# Altium PCB main.PcbDoc (part 4 of 16)
Units mil, origin at the board's own origin, x right, y up, seen from the top; angles counter-clockwise.
Board outline 8394.75 x 5164.44 mil, 7 copper layers (Top Layer 1, Layer 2, Layer 3, Unused, Layer 4_pow, Layer 5_gnd, Bottom 6+gnd), stack 64.043 mil thick; 364 components, 409 nets, 1932 pads, 1061 vias.
Unrouted connection lines stored in the file: 2.
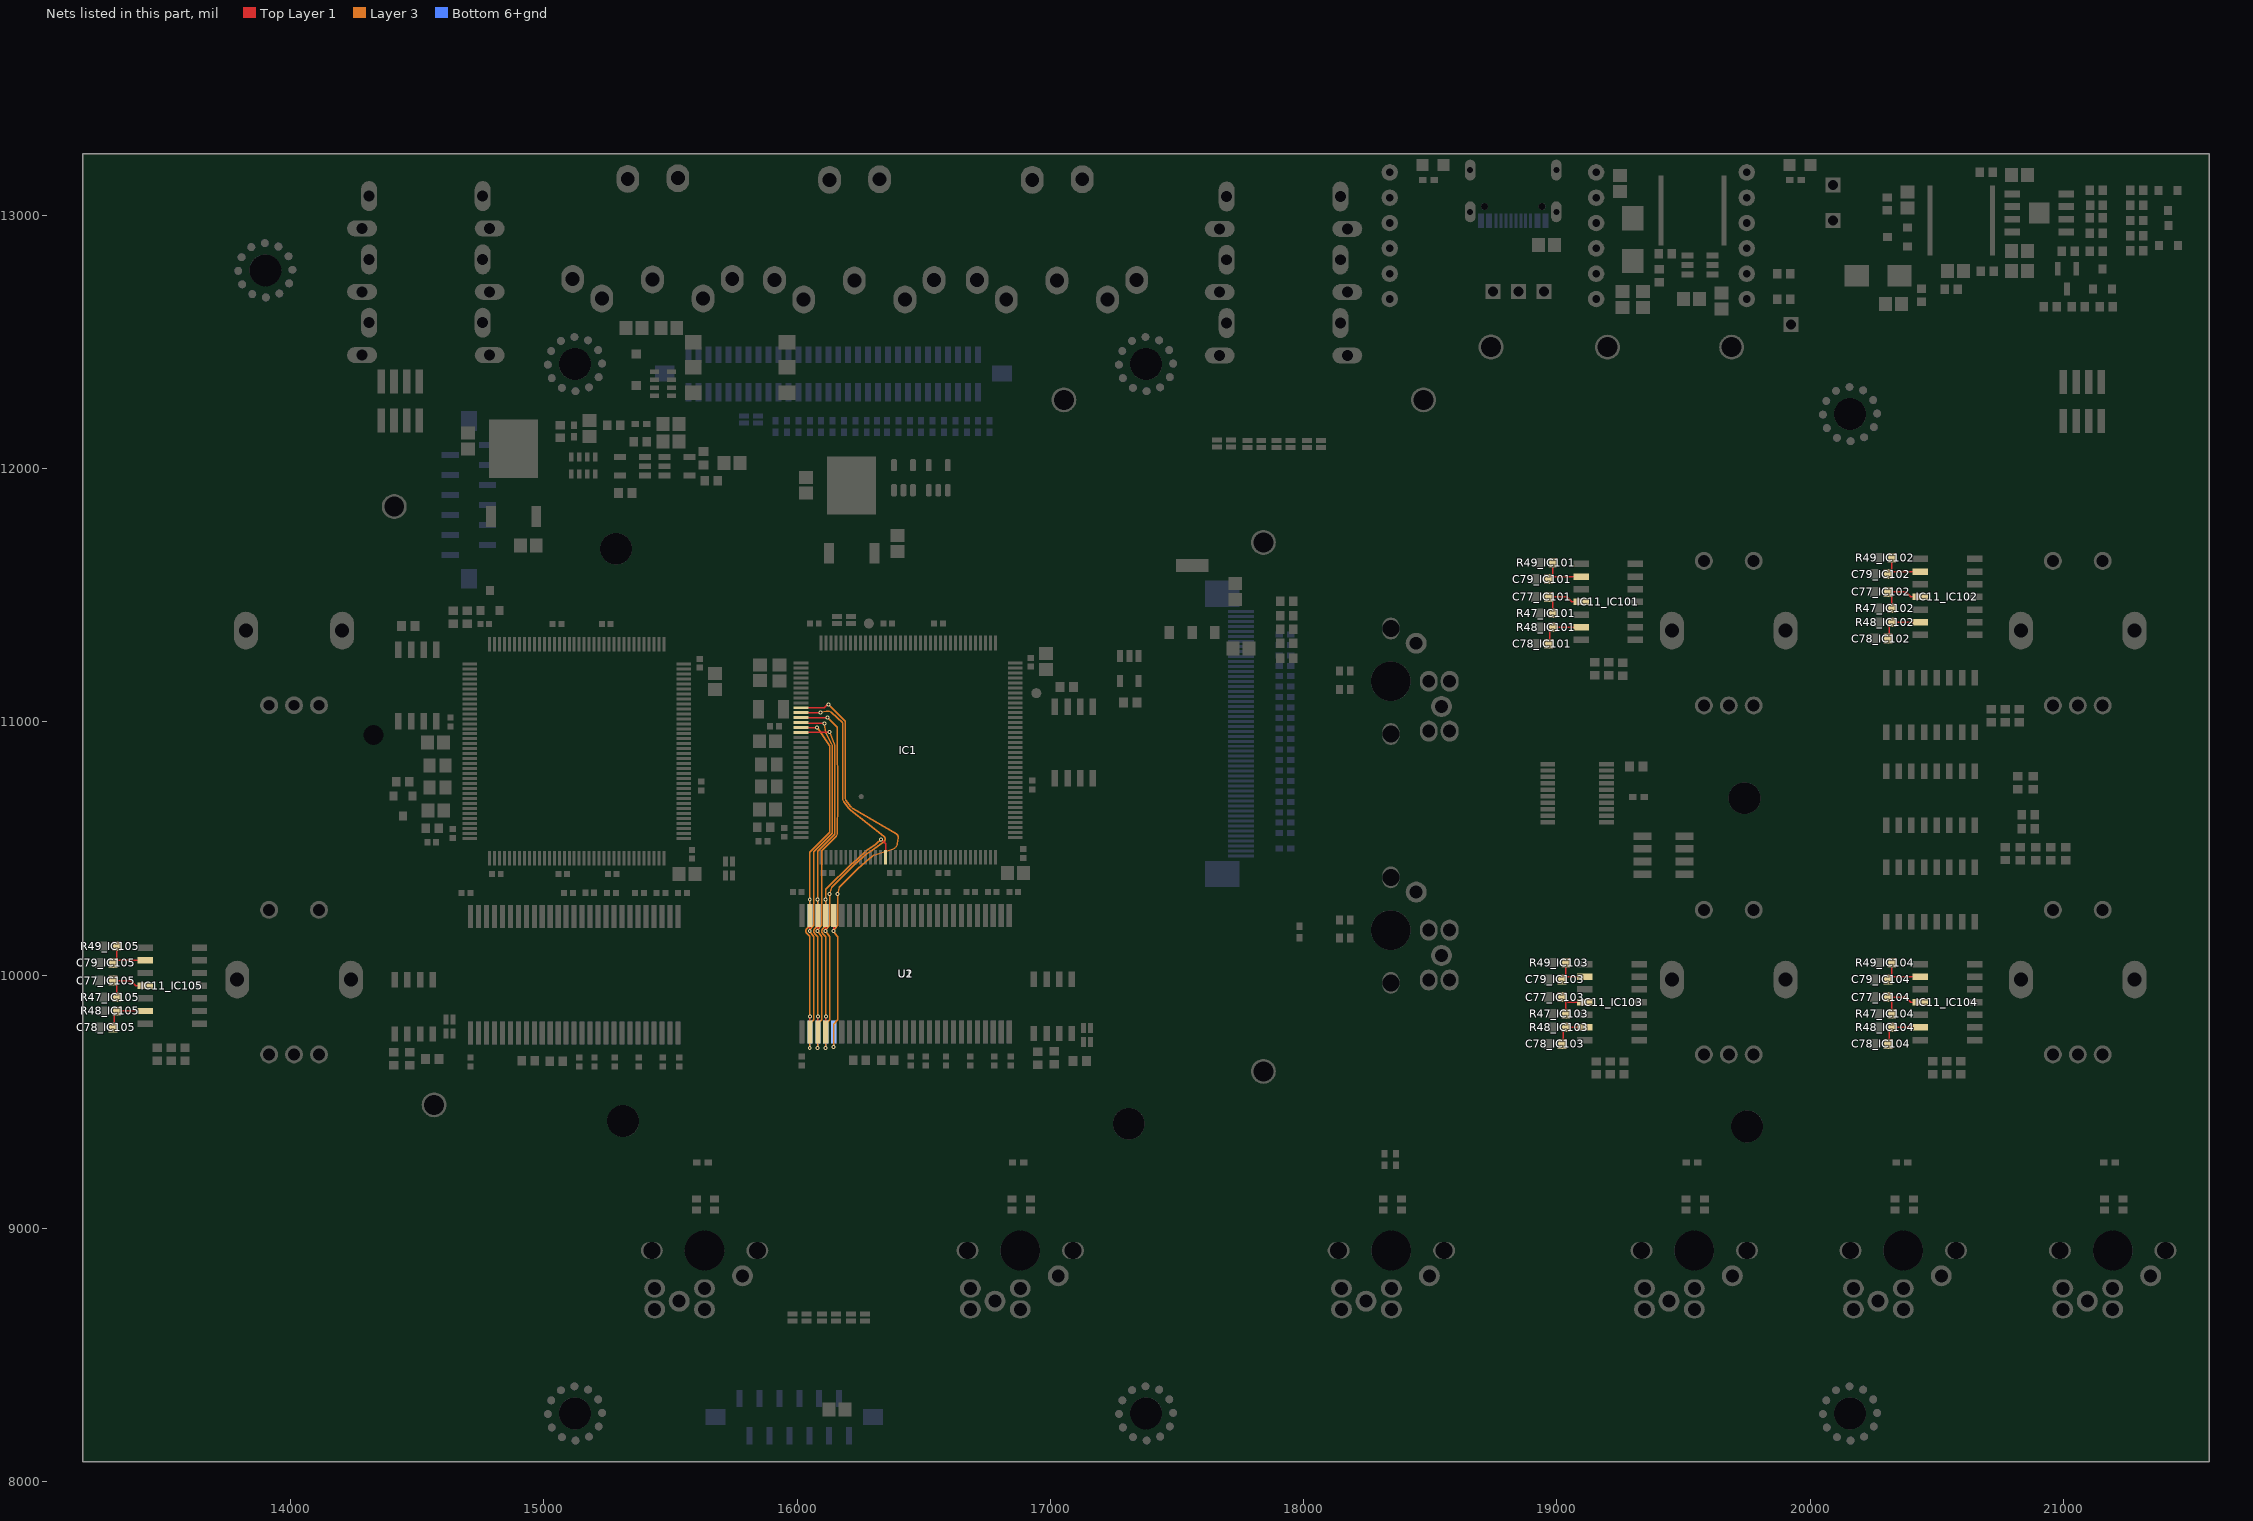
[diagram p7: the nets of this part, all layers, seen from the top]

## Via types
v1: diameter 15.75, hole 7.87, Top Layer 1 to Bottom 6+gnd, tented both sides, 961 vias
v2: diameter 27.56, hole 11.81, Top Layer 1 to Bottom 6+gnd, 45 vias
v3: diameter 23.62/23.62/23.62/23.62/23.62/23.62/23.62 (per signal layer), hole 12, Top Layer 1 to Bottom 6+gnd, tented top, 42 vias
v4: diameter 15.75, hole 7.87, Top Layer 1 to Bottom 6+gnd, 10 vias
v5: diameter 23.62/23.62/23.62/23.62/23.62/23.62/23.62 (per signal layer), hole 12, Top Layer 1 to Bottom 6+gnd, tented bottom, 3 vias

## Nets (pads, with @x,y where several pads share a name; then routed paths per layer and width w, separated by ;. In a path a pad name is that pad's centre, name@x,y a point inside that pad or via, vN(x,y) a via of type N, cw(c..) or ccw(c..) an arc to the next point about the centre after c; other vN are vias at no path point) (continued)
A0: IC1.10 U1.23 U2.23 | length 3439.8
  Top Layer 1 w5: IC1.10@16015.39,11056.14 16015.93,11056.67 16107.36,11056.67 16120.55,11069.86 v1(16123.41,11069.86) ; v1@16144.44,10174.62 U1.23@16144.44,10235.97
  Layer 3 w5: v1(16123.41,11069.86) 16188.13,11005.09 ; v1(16144.32,9716.01) 16144.32,9804.99 cw(c16149.32,9804.99) 16145.76,9808.51 16159.1,9821.89 ; v1(16144.44,10174.13) ccw(c16149.44,10174.13) 16145.49,10171.06 16159.51,10152.99 ; v1(16144.44,10174.13) cw(c16149.44,10174.13) v1@16145.51,10177.23 ; v1@16145.51,10177.22 16159.49,10194.98 ; v1(16160.27,10320.11) 16160.56,10302.31 ; v1@16160.27,10320.15 cw(c16165.27,10320.15) 16160.43,10321.39 16166.39,10345.1 cw(c16180.94,10341.44) 16170.29,10352.01 16236.64,10418.35 ; 16160.56,10149.97 16160.56,9825.33 ; 16189.59,11001.6 16189.62,10700.83 ccw(c16204.99,10700.79) 16192.68,10691.59 16212.01,10665.89 ; 16398.84,10542.97 16395.36,10518.61 ; 16159.1,9821.89 ccw(c16155.56,9825.42) 16160.56,9825.33 ; 16159.1,9821.89 ccw(c16155.56,9825.42) 16160.56,9825.33 ; 16159.1,9821.89 ccw(c16155.56,9825.42) 16160.56,9825.33 ; 16159.1,9821.89 ccw(c16155.56,9825.42) 16160.56,9825.33 ; 16159.1,9821.89 ccw(c16155.56,9825.42) 16160.56,9825.33 ; 16159.1,9821.89 ccw(c16155.56,9825.42) 16160.56,9825.33 ; 16159.1,9821.89 ccw(c16155.56,9825.42) 16160.56,9825.33 ; 16159.1,9821.89 ccw(c16155.56,9825.42) 16160.56,9825.33 ; 16159.1,9821.89 ccw(c16155.56,9825.42) 16160.56,9825.33 ; 16159.1,9821.89 ccw(c16155.56,9825.42) 16160.56,9825.33 ; 16159.1,9821.89 ccw(c16155.56,9825.42) 16160.56,9825.33 ; 16159.1,9821.89 ccw(c16155.56,9825.42) 16160.56,9825.33 ; 16159.1,9821.89 ccw(c16155.56,9825.42) 16160.56,9825.33 ; 16159.1,9821.89 ccw(c16155.56,9825.42) 16160.56,9825.33 ; 16159.1,9821.89 ccw(c16155.56,9825.42) 16160.56,9825.33 ; 16159.1,9821.89 ccw(c16155.56,9825.42) 16160.56,9825.33 ; 16159.51,10152.99 cw(c16155.56,10149.93) 16160.56,10150.02 ; 16159.51,10152.99 cw(c16155.56,10149.93) 16160.56,10150.02 ; 16159.51,10152.99 cw(c16155.56,10149.93) 16160.56,10150.02 ; 16159.51,10152.99 cw(c16155.56,10149.93) 16160.56,10150.02 ; 16159.51,10152.99 cw(c16155.56,10149.93) 16160.56,10150.02 ; 16159.51,10152.99 cw(c16155.56,10149.93) 16160.56,10150.02 ; 16159.51,10152.99 cw(c16155.56,10149.93) 16160.56,10150.02 ; 16159.51,10152.99 cw(c16155.56,10149.93) 16160.56,10150.02 ; 16159.51,10152.99 cw(c16155.56,10149.93) 16160.56,10150.02 ; 16159.51,10152.99 cw(c16155.56,10149.93) 16160.56,10150.02 ; 16159.51,10152.99 cw(c16155.56,10149.93) 16160.56,10150.02 ; 16159.51,10152.99 cw(c16155.56,10149.93) 16160.56,10150.02 ; 16159.51,10152.99 cw(c16155.56,10149.93) 16160.56,10150.02 ; 16159.51,10152.99 cw(c16155.56,10149.93) 16160.56,10150.02 ; 16159.51,10152.99 cw(c16155.56,10149.93) 16160.56,10150.02 ; 16159.51,10152.99 cw(c16155.56,10149.93) 16160.56,10150.02 ; 16159.49,10194.98 ccw(c16155.56,10198.07) 16160.56,10197.98 ; 16159.49,10194.98 ccw(c16155.56,10198.07) 16160.56,10197.98 ; 16159.49,10194.98 ccw(c16155.56,10198.07) 16160.56,10197.98 ; 16159.49,10194.98 ccw(c16155.56,10198.07) 16160.56,10197.98 ; 16159.49,10194.98 ccw(c16155.56,10198.07) 16160.56,10197.98 ; 16159.49,10194.98 ccw(c16155.56,10198.07) 16160.56,10197.98 ; 16159.49,10194.98 ccw(c16155.56,10198.07) 16160.56,10197.98 ; 16159.49,10194.98 ccw(c16155.56,10198.07) 16160.56,10197.98 ; 16159.49,10194.98 ccw(c16155.56,10198.07) 16160.56,10197.98 ; 16159.49,10194.98 ccw(c16155.56,10198.07) 16160.56,10197.98 ; 16159.49,10194.98 ccw(c16155.56,10198.07) 16160.56,10197.98 ; 16159.49,10194.98 ccw(c16155.56,10198.07) 16160.56,10197.98 ; 16159.49,10194.98 ccw(c16155.56,10198.07) 16160.56,10197.98 ; 16159.49,10194.98 ccw(c16155.56,10198.07) 16160.56,10197.98 ; 16159.49,10194.98 ccw(c16155.56,10198.07) 16160.56,10197.98 ; 16159.49,10194.98 ccw(c16155.56,10198.07) 16160.56,10197.98 ; 16160.56,10197.98 16160.56,10302.24 ; 16160.56,10302.25 ccw(c16155.56,10302.23) 16160.56,10302.31 ; 16160.56,10302.25 ccw(c16155.56,10302.23) 16160.56,10302.31 ; 16160.56,10302.25 ccw(c16155.56,10302.23) 16160.56,10302.31 ; 16160.56,10302.25 ccw(c16155.56,10302.23) 16160.56,10302.31 ; 16160.56,10302.25 ccw(c16155.56,10302.23) 16160.56,10302.31 ; 16188.13,11005.09 cw(c16184.59,11001.56) 16189.59,11001.65 ; 16188.13,11005.09 cw(c16184.59,11001.56) 16189.59,11001.65 ; 16188.13,11005.09 cw(c16184.59,11001.56) 16189.59,11001.65 ; 16188.13,11005.09 cw(c16184.59,11001.56) 16189.59,11001.65 ; 16188.13,11005.09 cw(c16184.59,11001.56) 16189.59,11001.65 ; 16188.13,11005.09 cw(c16184.59,11001.56) 16189.59,11001.65 ; 16188.13,11005.09 cw(c16184.59,11001.56) 16189.59,11001.65 ; 16188.13,11005.09 cw(c16184.59,11001.56) 16189.59,11001.65 ; 16188.13,11005.09 cw(c16184.59,11001.56) 16189.59,11001.65 ; 16188.13,11005.09 cw(c16184.59,11001.56) 16189.59,11001.65 ; 16188.13,11005.09 cw(c16184.59,11001.56) 16189.59,11001.65 ; 16188.13,11005.09 cw(c16184.59,11001.56) 16189.59,11001.65 ; 16188.13,11005.09 cw(c16184.59,11001.56) 16189.59,11001.65 ; 16188.13,11005.09 cw(c16184.59,11001.56) 16189.59,11001.65 ; 16188.13,11005.09 cw(c16184.59,11001.56) 16189.59,11001.65 ; 16188.13,11005.09 cw(c16184.59,11001.56) 16189.59,11001.65 ; 16212.01,10665.89 ccw(c16240.24,10687.2) 16222.46,10656.62 ; 16212.01,10665.89 ccw(c16240.24,10687.2) 16222.46,10656.62 ; 16212.01,10665.89 ccw(c16240.24,10687.2) 16222.46,10656.62 ; 16212.01,10665.89 ccw(c16240.24,10687.2) 16222.46,10656.62 ; 16212.01,10665.89 ccw(c16240.24,10687.2) 16222.46,10656.62 ; 16212.01,10665.89 ccw(c16240.24,10687.2) 16222.46,10656.62 ; 16212.01,10665.89 ccw(c16240.24,10687.2) 16222.46,10656.62 ; 16212.01,10665.89 ccw(c16240.24,10687.2) 16222.46,10656.62 ; 16212.01,10665.89 ccw(c16240.24,10687.2) 16222.46,10656.62 ; 16212.01,10665.89 ccw(c16240.24,10687.2) 16222.46,10656.62 ; 16212.01,10665.89 ccw(c16240.24,10687.2) 16222.46,10656.62 ; 16212.01,10665.89 ccw(c16240.24,10687.2) 16222.46,10656.62 ; 16212.01,10665.89 ccw(c16240.24,10687.2) 16222.46,10656.62 ; 16212.01,10665.89 ccw(c16240.24,10687.2) 16222.46,10656.62 ; 16212.01,10665.89 ccw(c16240.24,10687.2) 16222.46,10656.62 ; 16212.01,10665.89 ccw(c16240.24,10687.2) 16222.46,10656.62 ; 16222.46,10656.62 16391.35,10558.44 ; 16236.64,10418.35 cw(c16275.42,10379.36) 16239.05,10420.61 ; 16236.64,10418.35 cw(c16275.42,10379.36) 16239.05,10420.61 ; 16236.64,10418.35 cw(c16275.42,10379.36) 16239.05,10420.61 ; 16236.64,10418.35 cw(c16275.42,10379.36) 16239.05,10420.61 ; 16236.64,10418.35 cw(c16275.42,10379.36) 16239.05,10420.61 ; 16236.64,10418.35 cw(c16275.42,10379.36) 16239.05,10420.61 ; 16236.64,10418.35 cw(c16275.42,10379.36) 16239.05,10420.61 ; 16236.64,10418.35 cw(c16275.42,10379.36) 16239.05,10420.61 ; 16236.64,10418.35 cw(c16275.42,10379.36) 16239.05,10420.61 ; 16236.64,10418.35 cw(c16275.42,10379.36) 16239.05,10420.61 ; 16236.64,10418.35 cw(c16275.42,10379.36) 16239.05,10420.61 ; 16236.64,10418.35 cw(c16275.42,10379.36) 16239.05,10420.61 ; 16236.64,10418.35 cw(c16275.42,10379.36) 16239.05,10420.61 ; 16236.64,10418.35 cw(c16275.42,10379.36) 16239.05,10420.61 ; 16236.64,10418.35 cw(c16275.42,10379.36) 16239.05,10420.61 ; 16236.64,10418.35 cw(c16275.42,10379.36) 16239.05,10420.61 ; 16239.05,10420.61 16286.71,10462.64 ; 16286.71,10462.64 cw(c16329.94,10413.6) 16309.72,10475.77 ; 16286.71,10462.64 cw(c16329.94,10413.6) 16309.72,10475.77 ; 16286.71,10462.64 cw(c16329.94,10413.6) 16309.72,10475.77 ; 16286.71,10462.64 cw(c16329.94,10413.6) 16309.72,10475.77 ; 16286.71,10462.64 cw(c16329.94,10413.6) 16309.72,10475.77 ; 16286.71,10462.64 cw(c16329.94,10413.6) 16309.72,10475.77 ; 16286.71,10462.64 cw(c16329.94,10413.6) 16309.72,10475.77 ; 16286.71,10462.64 cw(c16329.94,10413.6) 16309.72,10475.77 ; 16286.71,10462.64 cw(c16329.94,10413.6) 16309.72,10475.77 ; 16286.71,10462.64 cw(c16329.94,10413.6) 16309.72,10475.77 ; 16286.71,10462.64 cw(c16329.94,10413.6) 16309.72,10475.77 ; 16286.71,10462.64 cw(c16329.94,10413.6) 16309.72,10475.77 ; 16286.71,10462.64 cw(c16329.94,10413.6) 16309.72,10475.77 ; 16286.71,10462.64 cw(c16329.94,10413.6) 16309.72,10475.77 ; 16286.71,10462.64 cw(c16329.94,10413.6) 16309.72,10475.77 ; 16286.71,10462.64 cw(c16329.94,10413.6) 16309.72,10475.77 ; 16309.72,10475.77 16378.11,10498.08 ; 16378.11,10498.08 ccw(c16370.24,10522.2) 16395.35,10518.61 ; 16378.11,10498.08 ccw(c16370.24,10522.2) 16395.35,10518.61 ; 16378.11,10498.08 ccw(c16370.24,10522.2) 16395.35,10518.61 ; 16378.11,10498.08 ccw(c16370.24,10522.2) 16395.35,10518.61 ; 16378.11,10498.08 ccw(c16370.24,10522.2) 16395.35,10518.61 ; 16378.11,10498.08 ccw(c16370.24,10522.2) 16395.35,10518.61 ; 16378.11,10498.08 ccw(c16370.24,10522.2) 16395.35,10518.61 ; 16378.11,10498.08 ccw(c16370.24,10522.2) 16395.35,10518.61 ; 16378.11,10498.08 ccw(c16370.24,10522.2) 16395.35,10518.61 ; 16378.11,10498.08 ccw(c16370.24,10522.2) 16395.35,10518.61 ; 16378.11,10498.08 ccw(c16370.24,10522.2) 16395.35,10518.61 ; 16378.11,10498.08 ccw(c16370.24,10522.2) 16395.35,10518.61 ; 16378.11,10498.08 ccw(c16370.24,10522.2) 16395.35,10518.61 ; 16378.11,10498.08 ccw(c16370.24,10522.2) 16395.35,10518.61 ; 16378.11,10498.08 ccw(c16370.24,10522.2) 16395.35,10518.61 ; 16378.11,10498.08 ccw(c16370.24,10522.2) 16395.35,10518.61 ; 16391.34,10558.44 cw(c16383.62,10545.15) 16398.84,10542.98 ; 16391.35,10558.44 cw(c16383.62,10545.15) 16398.84,10542.98 ; 16391.35,10558.44 cw(c16383.62,10545.15) 16398.84,10542.98 ; 16391.35,10558.44 cw(c16383.62,10545.15) 16398.84,10542.98 ; 16391.35,10558.44 cw(c16383.62,10545.15) 16398.84,10542.98 ; 16391.35,10558.44 cw(c16383.62,10545.15) 16398.84,10542.98 ; 16391.35,10558.44 cw(c16383.62,10545.15) 16398.84,10542.98 ; 16391.35,10558.44 cw(c16383.62,10545.15) 16398.84,10542.98 ; 16391.35,10558.44 cw(c16383.62,10545.15) 16398.84,10542.98 ; 16391.35,10558.44 cw(c16383.62,10545.15) 16398.84,10542.98 ; 16391.35,10558.44 cw(c16383.62,10545.15) 16398.84,10542.98 ; 16391.35,10558.44 cw(c16383.62,10545.15) 16398.84,10542.98 ; 16391.35,10558.44 cw(c16383.62,10545.15) 16398.84,10542.98 ; 16391.35,10558.44 cw(c16383.62,10545.15) 16398.84,10542.98 ; 16391.35,10558.44 cw(c16383.62,10545.15) 16398.84,10542.98 ; 16391.35,10558.44 cw(c16383.62,10545.15) 16398.84,10542.98
  Bottom 6+gnd w5: v1@16144.69,9713.75 U2.23@16144.69,9775.59
A1: IC1.11 U1.24 U2.24 | length 2953.5
  Top Layer 1 w5: IC1.11@16015.55,11036.61 16016.21,11037.27 16092.53,11037.27 v1(16093.35,11038.08) ; v1(16112.94,10174.13) U1.24@16112.94,10235.97
  Layer 3 w5: v1(16093.35,11038.08) 16115.67,11042.16 ; v1(16112.94,9713.5) 16112.94,9805.11 cw(c16117.94,9805.12) 16114.39,9808.63 16127.61,9821.89 ; v1@16112.96,10174.12 ccw(c16117.1,10176.92) 16113.03,10174.01 16128.14,10152.83 ; v1@16112.94,10179.83 16112.94,10179.7 cw(c16117.1,10176.92) 16113.53,10180.41 16127.61,10194.54 ; v1(16128.78,10320.11) 16129.07,10302.31 ; 16129.07,9825.38 16129.07,10149.97 ; 16138.82,10348.82 ccw(c16149.44,10338.23) 16135.04,10342.41 v1@16128.98,10321.55 ; 16138.83,10348.83 16222.49,10432.49 ; 16179.59,10994.71 16179.62,10700.78 ; 16115.67,11042.16 cw(c16120.24,11017.2) 16137.47,11035.83 ; 16115.67,11042.16 cw(c16120.24,11017.2) 16137.47,11035.83 ; 16115.67,11042.16 cw(c16120.24,11017.2) 16137.47,11035.83 ; 16115.67,11042.16 cw(c16120.24,11017.2) 16137.47,11035.83 ; 16115.67,11042.16 cw(c16120.24,11017.2) 16137.47,11035.83 ; 16127.61,9821.89 ccw(c16124.07,9825.42) 16129.07,9825.33 ; 16127.61,9821.89 ccw(c16124.07,9825.42) 16129.07,9825.33 ; 16127.61,9821.89 ccw(c16124.07,9825.42) 16129.07,9825.33 ; 16127.61,9821.89 ccw(c16124.07,9825.42) 16129.07,9825.33 ; 16127.61,9821.89 ccw(c16124.07,9825.42) 16129.07,9825.33 ; 16127.61,9821.89 ccw(c16124.07,9825.42) 16129.07,9825.33 ; 16127.61,9821.89 ccw(c16124.07,9825.42) 16129.07,9825.33 ; 16127.61,9821.89 ccw(c16124.07,9825.42) 16129.07,9825.33 ; 16127.61,9821.89 ccw(c16124.07,9825.42) 16129.07,9825.33 ; 16127.61,9821.89 ccw(c16124.07,9825.42) 16129.07,9825.33 ; 16127.61,9821.89 ccw(c16124.07,9825.42) 16129.07,9825.33 ; 16127.61,9821.89 ccw(c16124.07,9825.42) 16129.07,9825.33 ; 16127.61,9821.89 ccw(c16124.07,9825.42) 16129.07,9825.33 ; 16127.61,9821.89 ccw(c16124.07,9825.42) 16129.07,9825.33 ; 16127.61,9821.89 ccw(c16124.07,9825.42) 16129.07,9825.33 ; 16127.61,9821.89 ccw(c16124.07,9825.42) 16129.07,9825.33 ; 16127.61,10194.54 ccw(c16124.07,10198.07) 16129.07,10197.98 ; 16127.61,10194.54 ccw(c16124.07,10198.07) 16129.07,10197.98 ; 16127.61,10194.54 ccw(c16124.07,10198.07) 16129.07,10197.98 ; 16127.61,10194.54 ccw(c16124.07,10198.07) 16129.07,10197.98 ; 16127.61,10194.54 ccw(c16124.07,10198.07) 16129.07,10197.98 ; 16127.61,10194.54 ccw(c16124.07,10198.07) 16129.07,10197.98 ; 16127.61,10194.54 ccw(c16124.07,10198.07) 16129.07,10197.98 ; 16127.61,10194.54 ccw(c16124.07,10198.07) 16129.07,10197.98 ; 16127.61,10194.54 ccw(c16124.07,10198.07) 16129.07,10197.98 ; 16127.61,10194.54 ccw(c16124.07,10198.07) 16129.07,10197.98 ; 16127.61,10194.54 ccw(c16124.07,10198.07) 16129.07,10197.98 ; 16127.61,10194.54 ccw(c16124.07,10198.07) 16129.07,10197.98 ; 16127.61,10194.54 ccw(c16124.07,10198.07) 16129.07,10197.98 ; 16127.61,10194.54 ccw(c16124.07,10198.07) 16129.07,10197.98 ; 16127.61,10194.54 ccw(c16124.07,10198.07) 16129.07,10197.98 ; 16127.61,10194.54 ccw(c16124.07,10198.07) 16129.07,10197.98 ; 16128.14,10152.83 cw(c16124.07,10149.93) 16129.07,10150.02 ; 16128.14,10152.83 cw(c16124.07,10149.93) 16129.07,10150.02 ; 16128.14,10152.83 cw(c16124.07,10149.93) 16129.07,10150.02 ; 16128.14,10152.83 cw(c16124.07,10149.93) 16129.07,10150.02 ; 16128.14,10152.83 cw(c16124.07,10149.93) 16129.07,10150.02 ; 16128.14,10152.83 cw(c16124.07,10149.93) 16129.07,10150.02 ; 16128.14,10152.83 cw(c16124.07,10149.93) 16129.07,10150.02 ; 16128.14,10152.83 cw(c16124.07,10149.93) 16129.07,10150.02 ; 16128.14,10152.83 cw(c16124.07,10149.93) 16129.07,10150.02 ; 16128.14,10152.83 cw(c16124.07,10149.93) 16129.07,10150.02 ; 16128.14,10152.83 cw(c16124.07,10149.93) 16129.07,10150.02 ; 16128.14,10152.83 cw(c16124.07,10149.93) 16129.07,10150.02 ; 16128.14,10152.83 cw(c16124.07,10149.93) 16129.07,10150.02 ; 16128.14,10152.83 cw(c16124.07,10149.93) 16129.07,10150.02 ; 16128.14,10152.83 cw(c16124.07,10149.93) 16129.07,10150.02 ; 16128.14,10152.83 cw(c16124.07,10149.93) 16129.07,10150.02 ; v1@16128.78,10320.15 cw(c16133.78,10320.15) v1@16128.98,10321.55 ; v1@16128.78,10320.15 cw(c16133.78,10320.15) v1@16128.98,10321.55 ; v1@16128.78,10320.15 cw(c16133.78,10320.15) v1@16128.98,10321.55 ; v1@16128.78,10320.15 cw(c16133.78,10320.15) v1@16128.98,10321.55 ; v1@16128.78,10320.15 cw(c16133.78,10320.15) v1@16128.98,10321.55 ; v1@16128.78,10320.15 cw(c16133.78,10320.15) v1@16128.98,10321.55 ; v1@16128.78,10320.15 cw(c16133.78,10320.15) v1@16128.98,10321.55 ; v1@16128.78,10320.15 cw(c16133.78,10320.15) v1@16128.98,10321.55 ; v1@16128.78,10320.15 cw(c16133.78,10320.15) 16128.97,10321.54 ccw(c16133.78,10320.15) v1@16128.78,10320.15 ; 16129.07,10197.98 16129.07,10302.24 ; 16129.07,10302.25 ccw(c16124.07,10302.23) 16129.07,10302.31 ; 16129.07,10302.25 ccw(c16124.07,10302.23) 16129.07,10302.31 ; 16129.07,10302.25 ccw(c16124.07,10302.23) 16129.07,10302.31 ; 16129.07,10302.25 ccw(c16124.07,10302.23) 16129.07,10302.31 ; 16129.07,10302.25 ccw(c16124.07,10302.23) 16129.07,10302.31 ; 16137.47,11035.83 16177.99,10998.34 ; 16177.99,10998.34 cw(c16174.59,10994.67) 16179.59,10994.76 ; 16177.99,10998.34 cw(c16174.59,10994.67) 16179.59,10994.76 ; 16177.99,10998.34 cw(c16174.59,10994.67) 16179.59,10994.76 ; 16177.99,10998.34 cw(c16174.59,10994.67) 16179.59,10994.76 ; 16177.99,10998.34 cw(c16174.59,10994.67) 16179.59,10994.76 ; 16177.99,10998.34 cw(c16174.59,10994.67) 16179.59,10994.76 ; 16177.99,10998.34 cw(c16174.59,10994.67) 16179.59,10994.76 ; 16177.99,10998.34 cw(c16174.59,10994.67) 16179.59,10994.76 ; 16177.99,10998.34 cw(c16174.59,10994.67) 16179.59,10994.76 ; 16177.99,10998.34 cw(c16174.59,10994.67) 16179.59,10994.76 ; 16177.99,10998.34 cw(c16174.59,10994.67) 16179.59,10994.76 ; 16177.99,10998.34 cw(c16174.59,10994.67) 16179.59,10994.76 ; 16177.99,10998.34 cw(c16174.59,10994.67) 16179.59,10994.76 ; 16177.99,10998.34 cw(c16174.59,10994.67) 16179.59,10994.76 ; 16177.99,10998.34 cw(c16174.59,10994.67) 16179.59,10994.76 ; 16177.99,10998.34 cw(c16174.59,10994.67) 16179.59,10994.76 ; 16179.62,10700.78 ccw(c16204.99,10700.79) 16184.7,10685.56 ; 16179.62,10700.78 ccw(c16204.99,10700.79) 16184.7,10685.56 ; 16179.62,10700.78 ccw(c16204.99,10700.79) 16184.7,10685.56 ; 16179.62,10700.78 ccw(c16204.99,10700.79) 16184.7,10685.56 ; 16179.62,10700.78 ccw(c16204.99,10700.79) 16184.7,10685.56 ; 16179.62,10700.78 ccw(c16204.99,10700.79) 16184.7,10685.56 ; 16179.62,10700.78 ccw(c16204.99,10700.79) 16184.7,10685.56 ; 16179.62,10700.78 ccw(c16204.99,10700.79) 16184.7,10685.56 ; 16179.62,10700.78 ccw(c16204.99,10700.79) 16184.7,10685.56 ; 16179.62,10700.78 ccw(c16204.99,10700.79) 16184.7,10685.56 ; 16179.62,10700.78 ccw(c16204.99,10700.79) 16184.7,10685.56 ; 16179.62,10700.78 ccw(c16204.99,10700.79) 16184.7,10685.56 ; 16179.62,10700.78 ccw(c16204.99,10700.79) 16184.7,10685.56 ; 16179.62,10700.78 ccw(c16204.99,10700.79) 16184.7,10685.56 ; 16179.62,10700.78 ccw(c16204.99,10700.79) 16184.7,10685.56 ; 16179.62,10700.78 ccw(c16204.99,10700.79) 16184.7,10685.56 ; 16184.7,10685.56 16203.99,10659.9 ; 16203.99,10659.9 ccw(c16240.24,10687.2) 16212.05,10651.64 ; 16203.99,10659.9 ccw(c16240.24,10687.2) 16212.05,10651.64 ; 16203.99,10659.9 ccw(c16240.24,10687.2) 16212.05,10651.64 ; 16203.99,10659.9 ccw(c16240.24,10687.2) 16212.05,10651.64 ; 16203.99,10659.9 ccw(c16240.24,10687.2) 16212.05,10651.64 ; 16203.99,10659.9 ccw(c16240.24,10687.2) 16212.05,10651.64 ; 16203.99,10659.9 ccw(c16240.24,10687.2) 16212.05,10651.64 ; 16203.99,10659.9 ccw(c16240.24,10687.2) 16212.05,10651.64 ; 16203.99,10659.9 ccw(c16240.24,10687.2) 16212.05,10651.64 ; 16203.99,10659.9 ccw(c16240.24,10687.2) 16212.05,10651.64 ; 16203.99,10659.9 ccw(c16240.24,10687.2) 16212.05,10651.64 ; 16203.99,10659.9 ccw(c16240.24,10687.2) 16212.05,10651.64 ; 16203.99,10659.9 ccw(c16240.24,10687.2) 16212.05,10651.64 ; 16203.99,10659.9 ccw(c16240.24,10687.2) 16212.05,10651.64 ; 16203.99,10659.9 ccw(c16240.24,10687.2) 16212.05,10651.64 ; 16203.99,10659.9 ccw(c16240.24,10687.2) 16212.05,10651.64 ; 16212.05,10651.64 16341.72,10548.88 ; 16222.49,10432.49 cw(c16275.42,10379.36) 16225.87,10435.65 ; 16222.49,10432.49 cw(c16275.42,10379.36) 16225.87,10435.65 ; 16222.49,10432.49 cw(c16275.42,10379.36) 16225.87,10435.65 ; 16222.49,10432.49 cw(c16275.42,10379.36) 16225.87,10435.65 ; 16222.49,10432.49 cw(c16275.42,10379.36) 16225.87,10435.65 ; 16222.49,10432.49 cw(c16275.42,10379.36) 16225.87,10435.65 ; 16222.49,10432.49 cw(c16275.42,10379.36) 16225.87,10435.65 ; 16222.49,10432.49 cw(c16275.42,10379.36) 16225.87,10435.65 ; 16222.49,10432.49 cw(c16275.42,10379.36) 16225.87,10435.65 ; 16222.49,10432.49 cw(c16275.42,10379.36) 16225.87,10435.65 ; 16222.49,10432.49 cw(c16275.42,10379.36) 16225.87,10435.65 ; 16222.49,10432.49 cw(c16275.42,10379.36) 16225.87,10435.65 ; 16222.49,10432.49 cw(c16275.42,10379.36) 16225.87,10435.65 ; 16222.49,10432.49 cw(c16275.42,10379.36) 16225.87,10435.65 ; 16222.49,10432.49 cw(c16275.42,10379.36) 16225.87,10435.65 ; 16222.49,10432.49 cw(c16275.42,10379.36) 16225.87,10435.65 ; 16225.87,10435.65 16273.47,10477.63 ; 16273.47,10477.63 cw(c16329.94,10413.6) 16282.03,10484.26 ; 16273.47,10477.63 cw(c16329.94,10413.6) 16282.03,10484.26 ; 16273.47,10477.63 cw(c16329.94,10413.6) 16282.03,10484.26 ; 16273.47,10477.63 cw(c16329.94,10413.6) 16282.03,10484.26 ; 16273.47,10477.63 cw(c16329.94,10413.6) 16282.03,10484.26 ; 16273.47,10477.63 cw(c16329.94,10413.6) 16282.03,10484.26 ; 16273.47,10477.63 cw(c16329.94,10413.6) 16282.03,10484.26 ; 16273.47,10477.63 cw(c16329.94,10413.6) 16282.03,10484.26 ; 16273.47,10477.63 cw(c16329.94,10413.6) 16282.03,10484.26 ; 16273.47,10477.63 cw(c16329.94,10413.6) 16282.03,10484.26 ; 16273.47,10477.63 cw(c16329.94,10413.6) 16282.03,10484.26 ; 16273.47,10477.63 cw(c16329.94,10413.6) 16282.03,10484.26 ; 16273.47,10477.63 cw(c16329.94,10413.6) 16282.03,10484.26 ; 16273.47,10477.63 cw(c16329.94,10413.6) 16282.03,10484.26 ; 16273.47,10477.63 cw(c16329.94,10413.6) 16282.03,10484.26 ; 16273.47,10477.63 cw(c16329.94,10413.6) 16282.03,10484.26 ; 16282.03,10484.26 16340.8,10524.1 ; 16340.8,10524.11 ccw(c16332.17,10536.83) 16341.72,10548.88 ; 16340.8,10524.11 ccw(c16332.17,10536.83) 16341.72,10548.88 ; 16340.8,10524.11 ccw(c16332.17,10536.83) 16341.72,10548.88 ; 16340.8,10524.11 ccw(c16332.17,10536.83) 16341.72,10548.88 ; 16340.8,10524.11 ccw(c16332.17,10536.83) 16341.72,10548.88 ; 16340.8,10524.11 ccw(c16332.17,10536.83) 16341.72,10548.88 ; 16340.8,10524.11 ccw(c16332.17,10536.83) 16341.72,10548.88 ; 16340.8,10524.1 ccw(c16332.17,10536.83) 16341.72,10548.88
  Bottom 6+gnd w5: v1@16113.19,9713.75 U2.24@16113.19,9775.59
A2: IC1.12 U1.25 U2.25 | length 1805.6
  Top Layer 1 w5: IC1.12@16015.39,11016.77 16015.61,11016.99 16120.02,11016.99 v1(16120.24,11017.2) ; v1(16081.45,10174.13) U1.25@16081.45,10235.98
  Layer 3 w5: v1(16081.45,9713.5) 16081.45,9805.11 cw(c16086.45,9805.12) 16082.89,9808.63 16096.11,9821.89 ; v1@16081.46,10174.12 ccw(c16085.6,10176.92) 16081.53,10174.01 16096.64,10152.83 ; v1@16081.45,10179.83 16081.45,10179.7 cw(c16085.6,10176.92) 16082.03,10180.41 16096.11,10194.54 ; 16097.57,9825.38 16097.57,10150.02 ; v1(16120.24,11017.2) 16158.03,10979.41 ; 16158.11,10979.32 cw(c16154.49,10975.88) 16159.49,10975.88 16159.54,10682.14 cw(c16149.53,10682.09) 16159.53,10682.07 16159.51,10564.01 cw(c16134.51,10564.02) 16152.24,10546.4 16099.02,10493.17 ; 16096.11,9821.89 ccw(c16092.57,9825.42) 16097.57,9825.33 ; 16096.11,9821.89 ccw(c16092.57,9825.42) 16097.57,9825.33 ; 16096.11,9821.89 ccw(c16092.57,9825.42) 16097.57,9825.33 ; 16096.11,9821.89 ccw(c16092.57,9825.42) 16097.57,9825.33 ; 16096.11,9821.89 ccw(c16092.57,9825.42) 16097.57,9825.33 ; 16096.11,9821.89 ccw(c16092.57,9825.42) 16097.57,9825.33 ; 16096.11,9821.89 ccw(c16092.57,9825.42) 16097.57,9825.33 ; 16096.11,9821.89 ccw(c16092.57,9825.42) 16097.57,9825.33 ; 16096.11,9821.89 ccw(c16092.57,9825.42) 16097.57,9825.33 ; 16096.11,9821.89 ccw(c16092.57,9825.42) 16097.57,9825.33 ; 16096.11,9821.89 ccw(c16092.57,9825.42) 16097.57,9825.33 ; 16096.11,9821.89 ccw(c16092.57,9825.42) 16097.57,9825.33 ; 16096.11,9821.89 ccw(c16092.57,9825.42) 16097.57,9825.33 ; 16096.11,9821.89 ccw(c16092.57,9825.42) 16097.57,9825.33 ; 16096.11,9821.89 ccw(c16092.57,9825.42) 16097.57,9825.33 ; 16096.11,9821.89 ccw(c16092.57,9825.42) 16097.57,9825.33 ; 16096.11,10194.54 ccw(c16092.57,10198.07) 16097.57,10197.98 ; 16096.11,10194.54 ccw(c16092.57,10198.07) 16097.57,10197.98 ; 16096.11,10194.54 ccw(c16092.57,10198.07) 16097.57,10197.98 ; 16096.11,10194.54 ccw(c16092.57,10198.07) 16097.57,10197.98 ; 16096.11,10194.54 ccw(c16092.57,10198.07) 16097.57,10197.98 ; 16096.11,10194.54 ccw(c16092.57,10198.07) 16097.57,10197.98 ; 16096.11,10194.54 ccw(c16092.57,10198.07) 16097.57,10197.98 ; 16096.11,10194.54 ccw(c16092.57,10198.07) 16097.57,10197.98 ; 16096.11,10194.54 ccw(c16092.57,10198.07) 16097.57,10197.98 ; 16096.11,10194.54 ccw(c16092.57,10198.07) 16097.57,10197.98 ; 16096.11,10194.54 ccw(c16092.57,10198.07) 16097.57,10197.98 ; 16096.11,10194.54 ccw(c16092.57,10198.07) 16097.57,10197.98 ; 16096.11,10194.54 ccw(c16092.57,10198.07) 16097.57,10197.98 ; 16096.11,10194.54 ccw(c16092.57,10198.07) 16097.57,10197.98 ; 16096.11,10194.54 ccw(c16092.57,10198.07) 16097.57,10197.98 ; 16096.11,10194.54 ccw(c16092.57,10198.07) 16097.57,10197.98 ; 16096.64,10152.83 cw(c16092.57,10149.93) 16097.57,10150.02 ; 16096.64,10152.83 cw(c16092.57,10149.93) 16097.57,10150.02 ; 16096.64,10152.83 cw(c16092.57,10149.93) 16097.57,10150.02 ; 16096.64,10152.83 cw(c16092.57,10149.93) 16097.57,10150.02 ; 16096.64,10152.83 cw(c16092.57,10149.93) 16097.57,10150.02 ; 16096.64,10152.83 cw(c16092.57,10149.93) 16097.57,10150.02 ; 16096.64,10152.83 cw(c16092.57,10149.93) 16097.57,10150.02 ; 16096.64,10152.83 cw(c16092.57,10149.93) 16097.57,10150.02 ; 16096.64,10152.83 cw(c16092.57,10149.93) 16097.57,10150.02 ; 16096.64,10152.83 cw(c16092.57,10149.93) 16097.57,10150.02 ; 16096.64,10152.83 cw(c16092.57,10149.93) 16097.57,10150.02 ; 16096.64,10152.83 cw(c16092.57,10149.93) 16097.57,10150.02 ; 16096.64,10152.83 cw(c16092.57,10149.93) 16097.57,10150.02 ; 16096.64,10152.83 cw(c16092.57,10149.93) 16097.57,10150.02 ; 16096.64,10152.83 cw(c16092.57,10149.93) 16097.57,10150.02 ; 16096.64,10152.83 cw(c16092.57,10149.93) 16097.57,10150.02 ; 16097.57,10198.02 16097.57,10489.66 ; 16097.57,10489.66 cw(c16102.57,10489.66) 16099.02,10493.17 ; 16097.57,10489.66 cw(c16102.57,10489.66) 16099.02,10493.17 ; 16097.57,10489.66 cw(c16102.57,10489.66) 16099.02,10493.17 ; 16097.57,10489.66 cw(c16102.57,10489.66) 16099.02,10493.17 ; 16097.57,10489.66 cw(c16102.57,10489.66) 16099.02,10493.17 ; 16097.57,10489.66 cw(c16102.57,10489.66) 16099.02,10493.17 ; 16097.57,10489.66 cw(c16102.57,10489.66) 16099.02,10493.17 ; 16097.57,10489.66 cw(c16102.57,10489.66) 16099.02,10493.17 ; 16097.57,10489.66 cw(c16102.57,10489.66) 16099.02,10493.17 ; 16097.57,10489.66 cw(c16102.57,10489.66) 16099.02,10493.17 ; 16097.57,10489.66 cw(c16102.57,10489.66) 16099.02,10493.17 ; 16097.57,10489.66 cw(c16102.57,10489.66) 16099.02,10493.17 ; 16097.57,10489.66 cw(c16102.57,10489.66) 16099.02,10493.17 ; 16097.57,10489.66 cw(c16102.57,10489.66) 16099.02,10493.17 ; 16097.57,10489.66 cw(c16102.57,10489.66) 16099.02,10493.17 ; 16097.57,10489.66 cw(c16102.57,10489.66) 16099.02,10493.17 ; 16158.03,10979.41 cw(c16154.49,10975.88) 16158.08,10979.36 ; 16158.03,10979.41 cw(c16154.49,10975.88) 16158.08,10979.36 ; 16158.03,10979.41 cw(c16154.49,10975.88) 16158.08,10979.36 ; 16158.03,10979.41 cw(c16154.49,10975.88) 16158.08,10979.36 ; 16158.03,10979.41 cw(c16154.49,10975.88) 16158.08,10979.36 ; 16158.03,10979.41 cw(c16154.49,10975.88) 16158.08,10979.36 ; 16158.03,10979.41 cw(c16154.49,10975.88) 16158.08,10979.36 ; 16158.03,10979.41 cw(c16154.49,10975.88) 16158.08,10979.36 ; 16158.03,10979.41 cw(c16154.49,10975.88) 16158.08,10979.36 ; 16158.03,10979.41 cw(c16154.49,10975.88) 16158.08,10979.36 ; 16158.03,10979.41 cw(c16154.49,10975.88) 16158.08,10979.36 ; 16158.03,10979.41 cw(c16154.49,10975.88) 16158.08,10979.36 ; 16158.03,10979.41 cw(c16154.49,10975.88) 16158.08,10979.36 ; 16158.03,10979.41 cw(c16154.49,10975.88) 16158.08,10979.36 ; 16158.03,10979.41 cw(c16154.49,10975.88) 16158.08,10979.36 ; 16158.03,10979.41 cw(c16154.49,10975.88) 16158.08,10979.36
  Bottom 6+gnd w5: v1@16081.69,9713.75 U2.25@16081.69,9775.59
A3: IC1.13 U1.26 U2.26 | length 1741.8
  Top Layer 1 w5: IC1.13@16015.55,10997.24 16017.34,10995.45 16106.52,10995.45 v1(16108.15,10993.82) ; v1(16049.95,10174.13) U1.26@16049.95,10235.97
  Layer 3 w5: v1(16049.95,9713.5) 16049.95,9805.11 cw(c16054.95,9805.12) 16051.4,9808.63 16064.63,9821.86 ccw(c16061.07,9825.38) 16066.07,9825.38 16066.07,10149.97 ; v1(16049.95,10174.13) ccw(c16054.11,10176.92) 16050.04,10174.01 16065.15,10152.83 ; v1@16049.95,10179.83 16049.95,10179.7 cw(c16054.11,10176.92) 16050.53,10180.41 16064.62,10194.54 ; v1(16108.15,10993.82) 16113.55,10957.68 ; 16136.57,10912.12 cw(c16114.49,10900.41) 16136.62,10912.04 ; 16138.07,10560.51 16066.07,10488.52 16066.07,10198.02 ; 16139.54,10682.12 16139.49,10900.41 ccw(c16114.49,10900.41) 16136.62,10912.04 ; 16139.53,10682.13 cw(c16129.53,10682.06) 16139.53,10681.95 16139.51,10564.02 ; 16064.62,10194.54 ccw(c16061.07,10198.07) 16066.07,10197.98 ; 16064.62,10194.54 ccw(c16061.07,10198.07) 16066.07,10197.98 ; 16064.62,10194.54 ccw(c16061.07,10198.07) 16066.07,10197.98 ; 16064.62,10194.54 ccw(c16061.07,10198.07) 16066.07,10197.98 ; 16064.62,10194.54 ccw(c16061.07,10198.07) 16066.07,10197.98 ; 16064.62,10194.54 ccw(c16061.07,10198.07) 16066.07,10197.98 ; 16064.62,10194.54 ccw(c16061.07,10198.07) 16066.07,10197.98 ; 16064.62,10194.54 ccw(c16061.07,10198.07) 16066.07,10197.98 ; 16064.62,10194.54 ccw(c16061.07,10198.07) 16066.07,10197.98 ; 16064.62,10194.54 ccw(c16061.07,10198.07) 16066.07,10197.98 ; 16064.62,10194.54 ccw(c16061.07,10198.07) 16066.07,10197.98 ; 16064.62,10194.54 ccw(c16061.07,10198.07) 16066.07,10197.98 ; 16064.62,10194.54 ccw(c16061.07,10198.07) 16066.07,10197.98 ; 16064.62,10194.54 ccw(c16061.07,10198.07) 16066.07,10197.98 ; 16064.62,10194.54 ccw(c16061.07,10198.07) 16066.07,10197.98 ; 16064.62,10194.54 ccw(c16061.07,10198.07) 16066.07,10197.98 ; 16065.14,10152.83 cw(c16061.07,10149.93) 16066.07,10150.02 ; 16065.14,10152.83 cw(c16061.07,10149.93) 16066.07,10150.02 ; 16065.14,10152.83 cw(c16061.07,10149.93) 16066.07,10150.02 ; 16065.14,10152.83 cw(c16061.07,10149.93) 16066.07,10150.02 ; 16065.14,10152.83 cw(c16061.07,10149.93) 16066.07,10150.02 ; 16065.14,10152.83 cw(c16061.07,10149.93) 16066.07,10150.02 ; 16065.14,10152.83 cw(c16061.07,10149.93) 16066.07,10150.02 ; 16065.14,10152.83 cw(c16061.07,10149.93) 16066.07,10150.02 ; 16065.14,10152.83 cw(c16061.07,10149.93) 16066.07,10150.02 ; 16065.14,10152.83 cw(c16061.07,10149.93) 16066.07,10150.02 ; 16065.14,10152.83 cw(c16061.07,10149.93) 16066.07,10150.02 ; 16065.14,10152.83 cw(c16061.07,10149.93) 16066.07,10150.02 ; 16065.14,10152.83 cw(c16061.07,10149.93) 16066.07,10150.02 ; 16065.14,10152.83 cw(c16061.07,10149.93) 16066.07,10150.02 ; 16065.14,10152.83 cw(c16061.07,10149.93) 16066.07,10150.02 ; 16065.14,10152.83 cw(c16061.07,10149.93) 16066.07,10150.02 ; 16113.55,10957.68 ccw(c16128.75,10959.98) 16115.12,10952.87 ; 16113.55,10957.68 ccw(c16128.75,10959.98) 16115.12,10952.87 ; 16113.55,10957.68 ccw(c16128.75,10959.98) 16115.12,10952.87 ; 16113.55,10957.68 ccw(c16128.75,10959.98) 16115.12,10952.87 ; 16113.55,10957.68 ccw(c16128.75,10959.98) 16115.12,10952.87 ; 16113.55,10957.68 ccw(c16128.75,10959.98) 16115.12,10952.87 ; 16113.55,10957.68 ccw(c16128.75,10959.98) 16115.12,10952.87 ; 16113.55,10957.68 ccw(c16128.75,10959.98) 16115.12,10952.87 ; 16113.55,10957.68 ccw(c16128.75,10959.98) 16115.12,10952.87 ; 16113.55,10957.68 ccw(c16128.75,10959.98) 16115.12,10952.87 ; 16113.55,10957.68 ccw(c16128.75,10959.98) 16115.12,10952.87 ; 16113.55,10957.68 ccw(c16128.75,10959.98) 16115.12,10952.87 ; 16113.55,10957.68 ccw(c16128.75,10959.98) 16115.12,10952.87 ; 16113.55,10957.68 ccw(c16128.75,10959.98) 16115.12,10952.87 ; 16113.55,10957.68 ccw(c16128.75,10959.98) 16115.12,10952.87 ; 16113.55,10957.68 ccw(c16128.75,10959.98) 16115.12,10952.87 ; 16115.12,10952.87 16136.58,10912.12 ; 16136.62,10912.04 ccw(c16114.49,10900.41) 16136.58,10912.1 ; 16136.62,10912.04 ccw(c16114.49,10900.41) 16136.58,10912.1 ; 16136.62,10912.04 ccw(c16114.49,10900.41) 16136.58,10912.1 ; 16136.62,10912.04 ccw(c16114.49,10900.41) 16136.58,10912.1 ; 16138.09,10560.53 ccw(c16134.51,10564.02) 16139.51,10564.02 ; 16138.09,10560.53 ccw(c16134.51,10564.02) 16139.51,10564.02 ; 16138.09,10560.53 ccw(c16134.51,10564.02) 16139.51,10564.02 ; 16138.09,10560.53 ccw(c16134.51,10564.02) 16139.51,10564.02 ; 16138.09,10560.53 ccw(c16134.51,10564.02) 16139.51,10564.02
  Bottom 6+gnd w5: v1@16050.2,9713.75 U2.26@16050.2,9775.59
A3_IC101: C78_IC101.1 IC11_IC101.13 R48_IC101.2 | length 181.9
  Top Layer 1 w5: C78_IC101.1@18972.72,11308.82 18972.72,11363.82 R48_IC101.2@18982.72,11373.82 IC11_IC101.13@19095.43,11373.82
A3_IC102: C78_IC102.1 IC11_IC102.13 R48_IC102.2 | length 181.9
  Top Layer 1 w5: C78_IC102.1@20312.28,11328.82 20312.28,11383.82 R48_IC102.2@20322.28,11393.82 IC11_IC102.13@20435,11393.82
A3_IC103: C78_IC103.1 IC11_IC103.13 R48_IC103.2 | length 144.6
  Top Layer 1 w5: C78_IC103.1@19025,9728.82 19025,9783.82 R48_IC103.2@19035,9793.82 IC11_IC103.13@19110.43,9793.82
A3_IC104: C78_IC104.1 IC11_IC104.13 R48_IC104.2 | length 181.9
  Top Layer 1 w5: C78_IC104.1@20312.28,9728.82 20312.28,9783.82 R48_IC104.2@20322.28,9793.82 IC11_IC104.13@20435,9793.82
A3_IC105: C78_IC105.1 IC11_IC105.13 R48_IC105.2 | length 181.9
  Top Layer 1 w5: C78_IC105.1@13303.15,9793.82 13303.15,9848.82 R48_IC105.2@13313.15,9858.82 IC11_IC105.13@13425.86,9858.82
A4: IC1.14 U1.29 U2.29 | length 1865
  Top Layer 1 w5: IC1.14@16015.39,10977.4 16016.01,10978.02 16078.59,10978.02 v1(16079.21,10978.64) ; U1.29@16050.2,9775.59 16050.2,9837.43 v1(16050.44,9837.68) U1.29@16050.44,9775.83 ; U1.29@16050.69,9775.59 v1@16050.69,9837.43
  Layer 3 w5: v1(16050.44,9837.68) 16050.44,10149.83 ccw(c16045.44,10149.83) 16049,10153.35 16039.11,10163.23 ; v1(16079.21,10978.64) 16126.88,10908.87 cw(c16114.49,10900.41) 16129.49,10900.41 16129.54,10682.21 ; 16128.07,10564.65 16049.95,10486.54 v1(16049.95,10298.31) 16050.44,10297.82 16050.44,10199.75 cw(c16045.44,10199.75) 16049.19,10196.44 16038.45,10184.34 ; 16128.09,10564.68 ccw(c16124.51,10568.16) 16129.51,10568.16 16129.54,10681.96 ; 16038.45,10184.34 ccw(c16049.95,10174.13) 16039.11,10163.23 ; 16038.45,10184.34 ccw(c16049.95,10174.13) 16039.11,10163.23 ; 16038.45,10184.34 ccw(c16049.95,10174.13) 16039.11,10163.23 ; 16038.45,10184.34 ccw(c16049.95,10174.13) 16039.11,10163.23 ; 16038.45,10184.34 ccw(c16049.95,10174.13) 16039.11,10163.23 ; 16038.45,10184.34 ccw(c16049.95,10174.13) 16039.11,10163.23 ; 16038.45,10184.34 ccw(c16049.95,10174.13) 16039.11,10163.23 ; 16038.45,10184.34 ccw(c16049.95,10174.13) 16039.11,10163.23 ; 16038.45,10184.34 ccw(c16049.95,10174.13) 16039.11,10163.23 ; 16038.45,10184.34 ccw(c16049.95,10174.13) 16039.11,10163.23 ; 16038.45,10184.34 ccw(c16049.95,10174.13) 16039.11,10163.23 ; 16038.45,10184.34 ccw(c16049.95,10174.13) 16039.11,10163.23 ; 16038.45,10184.34 ccw(c16049.95,10174.13) 16039.11,10163.23 ; 16038.45,10184.34 ccw(c16049.95,10174.13) 16039.11,10163.23 ; 16038.45,10184.34 ccw(c16049.95,10174.13) 16039.11,10163.23 ; 16038.45,10184.34 ccw(c16049.95,10174.13) 16039.11,10163.23 ; 16129.53,10681.97 ccw(c16094.16,10682.09) 16129.53,10682.21 ; 16129.53,10681.97 ccw(c16094.16,10682.09) 16129.53,10682.21 ; 16129.53,10681.97 ccw(c16094.16,10682.09) 16129.53,10682.21 ; 16129.53,10681.97 ccw(c16094.16,10682.09) 16129.53,10682.21 ; 16129.53,10681.97 ccw(c16094.16,10682.09) 16129.53,10682.21 ; 16129.53,10681.97 ccw(c16094.16,10682.09) 16129.53,10682.21 ; 16129.53,10681.97 ccw(c16094.16,10682.09) 16129.53,10682.21 ; 16129.53,10681.97 ccw(c16094.16,10682.09) 16129.53,10682.21 ; 16129.53,10681.97 ccw(c16094.16,10682.09) 16129.53,10682.21 ; 16129.53,10681.97 ccw(c16094.16,10682.09) 16129.53,10682.21 ; 16129.53,10681.97 ccw(c16094.16,10682.09) 16129.53,10682.21 ; 16129.53,10681.97 ccw(c16094.16,10682.09) 16129.53,10682.21 ; 16129.53,10681.97 ccw(c16094.16,10682.09) 16129.53,10682.21 ; 16129.53,10681.97 ccw(c16094.16,10682.09) 16129.53,10682.21 ; 16129.53,10681.97 ccw(c16094.16,10682.09) 16129.53,10682.21 ; 16129.53,10681.96 ccw(c16094.16,10682.09) 16129.53,10682.21
  Bottom 6+gnd w5: U2.29@16050.2,10236.22 v1@16050.2,10298.06
A4_IC101: C77_IC101.1 IC11_IC101.11 R47_IC101.2 | length 200.1
  Top Layer 1 w5: R47_IC101.2@18982.72,11428.82 18982.72,11483.82 18972.72,11493.82 19038.26,11493.82 19058.26,11473.82 IC11_IC101.11@19095.43,11473.82
A4_IC102: C77_IC102.1 IC11_IC102.11 R47_IC102.2 | length 200.1
  Top Layer 1 w5: R47_IC102.2@20322.28,11448.82 20322.28,11503.82 20312.28,11513.82 20377.82,11513.82 20397.82,11493.82 IC11_IC102.11@20435,11493.82
A4_IC103: C77_IC103.1 IC11_IC103.11 R47_IC103.2 | length 162.9
  Top Layer 1 w5: R47_IC103.2@19035,9848.82 19035,9903.82 19025,9913.82 19045,9893.82 IC11_IC103.11@19110.43,9893.82
A4_IC104: C77_IC104.1 IC11_IC104.11 R47_IC104.2 | length 200.1
  Top Layer 1 w5: R47_IC104.2@20322.28,9848.82 20322.28,9903.82 20312.28,9913.82 20377.82,9913.82 20397.82,9893.82 IC11_IC104.11@20435,9893.82
A4_IC105: C77_IC105.1 IC11_IC105.11 R47_IC105.2 | length 200.1
  Top Layer 1 w5: R47_IC105.2@13313.15,9913.82 13313.15,9968.82 13303.15,9978.82 13368.69,9978.82 13388.69,9958.82 IC11_IC105.11@13425.86,9958.82
A5: IC1.15 U1.30 U2.30 | length 1571.9
  Top Layer 1 w5: IC1.15@16015.55,10957.87 16016.53,10958.85 16127.61,10958.85 v1(16128.75,10959.98) ; U1.30@16081.69,9775.59 v1@16081.69,9837.43
  Layer 3 w5: 16069.92,10184.31 ccw(c16081.45,10174.13) 16070.55,10163.29 16080.48,10153.31 ; 16069.93,10184.31 16080.68,10196.48 ; v1(16081.94,9837.68) 16081.94,10149.83 ; 16081.94,10199.75 16081.94,10297.82 v1(16081.45,10298.31) 16081.45,10487.68 ; v1(16128.75,10959.98) 16147.08,10913.17 cw(c16114.49,10900.41) 16149.49,10900.41 16149.54,10682.15 cw(c16129.53,10682.06) 16149.53,10681.99 ; 16080.48,10153.31 cw(c16076.94,10149.78) 16081.94,10149.87 ; 16080.48,10153.31 cw(c16076.94,10149.78) 16081.94,10149.87 ; 16080.48,10153.31 cw(c16076.94,10149.78) 16081.94,10149.87 ; 16080.48,10153.31 cw(c16076.94,10149.78) 16081.94,10149.87 ; 16080.48,10153.31 cw(c16076.94,10149.78) 16081.94,10149.87 ; 16080.48,10153.31 cw(c16076.94,10149.78) 16081.94,10149.87 ; 16080.48,10153.31 cw(c16076.94,10149.78) 16081.94,10149.87 ; 16080.48,10153.31 cw(c16076.94,10149.78) 16081.94,10149.87 ; 16080.48,10153.31 cw(c16076.94,10149.78) 16081.94,10149.87 ; 16080.48,10153.31 cw(c16076.94,10149.78) 16081.94,10149.87 ; 16080.48,10153.31 cw(c16076.94,10149.78) 16081.94,10149.87 ; 16080.48,10153.31 cw(c16076.94,10149.78) 16081.94,10149.87 ; 16080.48,10153.31 cw(c16076.94,10149.78) 16081.94,10149.87 ; 16080.48,10153.31 cw(c16076.94,10149.78) 16081.94,10149.87 ; 16080.48,10153.31 cw(c16076.94,10149.78) 16081.94,10149.87 ; 16080.48,10153.31 cw(c16076.94,10149.78) 16081.94,10149.87 ; 16080.68,10196.48 ccw(c16076.94,10199.79) 16081.94,10199.7 ; 16080.68,10196.48 ccw(c16076.94,10199.79) 16081.94,10199.7 ; 16080.68,10196.48 ccw(c16076.94,10199.79) 16081.94,10199.7 ; 16080.68,10196.48 ccw(c16076.94,10199.79) 16081.94,10199.7 ; 16080.68,10196.48 ccw(c16076.94,10199.79) 16081.94,10199.7 ; 16080.68,10196.48 ccw(c16076.94,10199.79) 16081.94,10199.7 ; 16080.68,10196.48 ccw(c16076.94,10199.79) 16081.94,10199.7 ; 16080.68,10196.48 ccw(c16076.94,10199.79) 16081.94,10199.7 ; 16080.68,10196.48 ccw(c16076.94,10199.79) 16081.94,10199.7 ; 16080.68,10196.48 ccw(c16076.94,10199.79) 16081.94,10199.7 ; 16080.68,10196.48 ccw(c16076.94,10199.79) 16081.94,10199.7 ; 16080.68,10196.48 ccw(c16076.94,10199.79) 16081.94,10199.7 ; 16080.68,10196.48 ccw(c16076.94,10199.79) 16081.94,10199.7 ; 16080.68,10196.48 ccw(c16076.94,10199.79) 16081.94,10199.7 ; 16080.68,10196.48 ccw(c16076.94,10199.79) 16081.94,10199.7 ; 16080.68,10196.48 ccw(c16076.94,10199.79) 16081.94,10199.7 ; 16081.45,10487.68 cw(c16086.45,10487.68) 16082.89,10491.19 ; 16081.45,10487.68 cw(c16086.45,10487.68) 16082.89,10491.19 ; 16081.45,10487.68 cw(c16086.45,10487.68) 16082.89,10491.19 ; 16081.45,10487.68 cw(c16086.45,10487.68) 16082.89,10491.19 ; 16081.45,10487.68 cw(c16086.45,10487.68) 16082.89,10491.19 ; 16081.45,10487.68 cw(c16086.45,10487.68) 16082.89,10491.19 ; 16081.45,10487.68 cw(c16086.45,10487.68) 16082.89,10491.19 ; 16081.45,10487.68 cw(c16086.45,10487.68) 16082.89,10491.19 ; 16081.45,10487.68 cw(c16086.45,10487.68) 16082.89,10491.19 ; 16081.45,10487.68 cw(c16086.45,10487.68) 16082.89,10491.19 ; 16081.45,10487.68 cw(c16086.45,10487.68) 16082.89,10491.19 ; 16081.45,10487.68 cw(c16086.45,10487.68) 16082.89,10491.19 ; 16081.45,10487.68 cw(c16086.45,10487.68) 16082.89,10491.19 ; 16081.45,10487.68 cw(c16086.45,10487.68) 16082.89,10491.19 ; 16081.45,10487.68 cw(c16086.45,10487.68) 16082.89,10491.19 ; 16081.45,10487.68 cw(c16086.45,10487.68) 16082.89,10491.19 ; 16082.89,10491.19 16145.16,10553.46 ccw(c16134.51,10564.02) 16149.51,10564.06 16149.54,10681.99 ; 16149.53,10682 ccw(c16129.53,10682.06) 16149.53,10682.12 ; 16149.53,10682 ccw(c16129.53,10682.06) 16149.53,10682.12 ; 16149.53,10682 ccw(c16129.53,10682.06) 16149.53,10682.12 ; 16149.53,10682 ccw(c16129.53,10682.06) 16149.53,10682.12
  Bottom 6+gnd w5: U2.30@16081.69,10236.22 v1@16081.69,10298.06
A5_IC101: C79_IC101.1 IC11_IC101.9 R49_IC101.2 | length 181.9
  Top Layer 1 w5: C79_IC101.1@18972.72,11563.82 C79_IC101.1@18982.72,11573.82 ; R49_IC101.2@18982.72,11628.82 C79_IC101.1@18982.72,11573.82 ; IC11_IC101.9@19095.43,11573.82 C79_IC101.1@18982.72,11573.82
A5_IC102: C79_IC102.1 IC11_IC102.9 R49_IC102.2 | length 181.9
  Top Layer 1 w5: C79_IC102.1@20312.28,11583.82 C79_IC102.1@20322.28,11593.82 ; R49_IC102.2@20322.28,11648.82 C79_IC102.1@20322.28,11593.82 ; IC11_IC102.9@20435,11593.82 C79_IC102.1@20322.28,11593.82
A5_IC103: C79_IC103.1 IC11_IC103.9 R49_IC103.2 | length 130.4
  Top Layer 1 w5: R49_IC103.2@19035,10048.82 19035,9993.82 IC11_IC103.9@19110.43,9993.82
A5_IC104: C79_IC104.1 IC11_IC104.9 R49_IC104.2 | length 181.9
  Top Layer 1 w5: C79_IC104.1@20312.28,9983.82 C79_IC104.1@20322.28,9993.82 ; R49_IC104.2@20322.28,10048.82 C79_IC104.1@20322.28,9993.82 ; IC11_IC104.9@20435,9993.82 C79_IC104.1@20322.28,9993.82
A5_IC105: C79_IC105.1 IC11_IC105.9 R49_IC105.2 | length 181.9
  Top Layer 1 w5: C79_IC105.1@13303.15,10048.82 C79_IC105.1@13313.15,10058.82 ; R49_IC105.2@13313.15,10113.82 C79_IC105.1@13313.15,10058.82 ; IC11_IC105.9@13425.86,10058.82 C79_IC105.1@13313.15,10058.82
A6: IC1.50 U1.31 U2.31 | length 1521.3
  Top Layer 1 w5: U1.31@16113.19,9775.59 v1@16113.19,9837.43 ; U1.31@16113.43,9775.83 v1(16113.43,9837.68) ; U1.31@16113.68,9775.59 v1@16113.68,9837.43 ; v1(16332.17,10536.83) 16349.72,10519.27 IC1.50@16349.72,10465.9
  Layer 3 w5: v1(16113.43,9837.68) 16113.43,10149.83 ; 16113.43,10199.75 16113.43,10297.82 v1(16112.94,10298.31) 16112.94,10337.87 ; 16273.69,10490.63 ccw(c16329.94,10413.6) 16266.86,10485.14 ; v1(16332.17,10536.83) 16312.05,10518.73 ; 16111.98,10153.31 cw(c16108.43,10149.78) 16113.43,10149.87 ; 16111.98,10153.31 cw(c16108.43,10149.78) 16113.43,10149.87 ; 16111.98,10153.31 cw(c16108.43,10149.78) 16113.43,10149.87 ; 16111.98,10153.31 cw(c16108.43,10149.78) 16113.43,10149.87 ; 16111.98,10153.31 cw(c16108.43,10149.78) 16113.43,10149.87 ; 16111.98,10153.31 cw(c16108.43,10149.78) 16113.43,10149.87 ; 16111.98,10153.31 cw(c16108.43,10149.78) 16113.43,10149.87 ; 16111.98,10153.31 cw(c16108.43,10149.78) 16113.43,10149.87 ; 16111.98,10153.31 cw(c16108.43,10149.78) 16113.43,10149.87 ; 16111.98,10153.31 cw(c16108.43,10149.78) 16113.43,10149.87 ; 16111.98,10153.31 cw(c16108.43,10149.78) 16113.43,10149.87 ; 16111.98,10153.31 cw(c16108.43,10149.78) 16113.43,10149.87 ; 16111.98,10153.31 cw(c16108.43,10149.78) 16113.43,10149.87 ; 16111.98,10153.31 cw(c16108.43,10149.78) 16113.43,10149.87 ; 16111.98,10153.31 cw(c16108.43,10149.78) 16113.43,10149.87 ; 16111.98,10153.31 cw(c16108.43,10149.78) 16113.43,10149.87 ; 16111.98,10153.31 16102.05,10163.28 cw(c16112.94,10174.13) 16101.42,10184.31 16112.18,10196.48 ; 16112.18,10196.48 ccw(c16108.43,10199.79) 16113.43,10199.7 ; 16112.18,10196.48 ccw(c16108.43,10199.79) 16113.43,10199.7 ; 16112.18,10196.48 ccw(c16108.43,10199.79) 16113.43,10199.7 ; 16112.18,10196.48 ccw(c16108.43,10199.79) 16113.43,10199.7 ; 16112.18,10196.48 ccw(c16108.43,10199.79) 16113.43,10199.7 ; 16112.18,10196.48 ccw(c16108.43,10199.79) 16113.43,10199.7 ; 16112.18,10196.48 ccw(c16108.43,10199.79) 16113.43,10199.7 ; 16112.18,10196.48 ccw(c16108.43,10199.79) 16113.43,10199.7 ; 16112.18,10196.48 ccw(c16108.43,10199.79) 16113.43,10199.7 ; 16112.18,10196.48 ccw(c16108.43,10199.79) 16113.43,10199.7 ; 16112.18,10196.48 ccw(c16108.43,10199.79) 16113.43,10199.7 ; 16112.18,10196.48 ccw(c16108.43,10199.79) 16113.43,10199.7 ; 16112.18,10196.48 ccw(c16108.43,10199.79) 16113.43,10199.7 ; 16112.18,10196.48 ccw(c16108.43,10199.79) 16113.43,10199.7 ; 16112.18,10196.48 ccw(c16108.43,10199.79) 16113.43,10199.7 ; 16112.18,10196.48 ccw(c16108.43,10199.79) 16113.43,10199.7 ; 16112.94,10337.87 cw(c16117.94,10337.87) 16114.46,10341.46 ; 16112.94,10337.87 cw(c16117.94,10337.87) 16114.46,10341.46 ; 16112.94,10337.87 cw(c16117.94,10337.87) 16114.46,10341.46 ; 16112.94,10337.87 cw(c16117.94,10337.87) 16114.46,10341.46 ; 16112.94,10337.87 cw(c16117.94,10337.87) 16114.46,10341.46 ; 16112.94,10337.87 cw(c16117.94,10337.87) 16114.46,10341.46 ; 16112.94,10337.87 cw(c16117.94,10337.87) 16114.46,10341.46 ; 16112.94,10337.87 cw(c16117.94,10337.87) 16114.46,10341.46 ; 16112.94,10337.87 cw(c16117.94,10337.87) 16114.46,10341.46 ; 16112.94,10337.87 cw(c16117.94,10337.87) 16114.46,10341.46 ; 16112.94,10337.87 cw(c16117.94,10337.87) 16114.46,10341.46 ; 16112.94,10337.87 cw(c16117.94,10337.87) 16114.46,10341.46 ; 16112.94,10337.87 cw(c16117.94,10337.87) 16114.46,10341.46 ; 16112.94,10337.87 cw(c16117.94,10337.87) 16114.46,10341.46 ; 16112.94,10337.87 cw(c16117.94,10337.87) 16114.46,10341.46 ; 16112.94,10337.87 cw(c16117.94,10337.87) 16114.46,10341.46 ; 16114.46,10341.46 16216.12,10440.25 ; 16216.12,10440.25 cw(c16275.42,10379.36) 16219.16,10443.07 ; 16216.12,10440.25 cw(c16275.42,10379.36) 16219.16,10443.07 ; 16216.12,10440.25 cw(c16275.42,10379.36) 16219.16,10443.07 ; 16216.12,10440.25 cw(c16275.42,10379.36) 16219.16,10443.07 ; 16216.12,10440.25 cw(c16275.42,10379.36) 16219.16,10443.07 ; 16216.12,10440.25 cw(c16275.42,10379.36) 16219.16,10443.07 ; 16216.12,10440.25 cw(c16275.42,10379.36) 16219.16,10443.07 ; 16216.12,10440.25 cw(c16275.42,10379.36) 16219.16,10443.07 ; 16216.12,10440.25 cw(c16275.42,10379.36) 16219.16,10443.07 ; 16216.12,10440.25 cw(c16275.42,10379.36) 16219.16,10443.07 ; 16216.12,10440.25 cw(c16275.42,10379.36) 16219.16,10443.07 ; 16216.12,10440.25 cw(c16275.42,10379.36) 16219.16,10443.07 ; 16216.12,10440.25 cw(c16275.42,10379.36) 16219.16,10443.07 ; 16216.12,10440.25 cw(c16275.42,10379.36) 16219.16,10443.07 ; 16216.12,10440.25 cw(c16275.42,10379.36) 16219.16,10443.07 ; 16216.12,10440.25 cw(c16275.42,10379.36) 16219.16,10443.07 ; 16219.16,10443.07 16266.86,10485.14 ; 16266.86,10485.14 cw(c16329.94,10413.6) 16273.69,10490.62 ; 16266.86,10485.14 cw(c16329.94,10413.6) 16273.69,10490.62 ; 16266.86,10485.14 cw(c16329.94,10413.6) 16273.69,10490.62 ; 16266.86,10485.14 cw(c16329.94,10413.6) 16273.69,10490.62 ; 16266.86,10485.14 cw(c16329.94,10413.6) 16273.69,10490.62 ; 16266.86,10485.14 cw(c16329.94,10413.6) 16273.69,10490.62 ; 16266.86,10485.14 cw(c16329.94,10413.6) 16273.69,10490.62 ; 16266.86,10485.14 cw(c16329.94,10413.6) 16273.69,10490.62 ; 16266.86,10485.14 cw(c16329.94,10413.6) 16273.69,10490.62 ; 16266.86,10485.14 cw(c16329.94,10413.6) 16273.69,10490.62 ; 16266.86,10485.14 cw(c16329.94,10413.6) 16273.69,10490.62 ; 16266.86,10485.14 cw(c16329.94,10413.6) 16273.69,10490.62 ; 16266.86,10485.14 cw(c16329.94,10413.6) 16273.69,10490.62 ; 16266.86,10485.14 cw(c16329.94,10413.6) 16273.69,10490.62 ; 16266.86,10485.14 cw(c16329.94,10413.6) 16273.69,10490.62 ; 16273.69,10490.62 16310.83,10517.74 ; 16310.83,10517.74 ccw(c16301.77,10530.16) 16312.05,10518.73 ; 16310.83,10517.74 ccw(c16301.77,10530.16) 16312.05,10518.73 ; 16310.83,10517.74 ccw(c16301.77,10530.16) 16312.05,10518.73 ; 16310.83,10517.74 ccw(c16301.77,10530.16) 16312.05,10518.73 ; 16310.83,10517.74 ccw(c16301.77,10530.16) 16312.05,10518.73 ; 16310.83,10517.74 ccw(c16301.77,10530.16) 16312.05,10518.73 ; 16310.83,10517.74 ccw(c16301.77,10530.16) 16312.05,10518.73 ; 16310.83,10517.74 ccw(c16301.77,10530.16) 16312.05,10518.73 ; 16310.83,10517.74 ccw(c16301.77,10530.16) 16312.05,10518.73 ; 16310.83,10517.74 ccw(c16301.77,10530.16) 16312.05,10518.73 ; 16310.83,10517.74 ccw(c16301.77,10530.16) 16312.05,10518.73 ; 16310.83,10517.74 ccw(c16301.77,10530.16) 16312.05,10518.73 ; 16310.83,10517.74 ccw(c16301.77,10530.16) 16312.05,10518.73 ; 16310.83,10517.74 ccw(c16301.77,10530.16) 16312.05,10518.73 ; 16310.83,10517.74 ccw(c16301.77,10530.16) 16312.05,10518.73 ; 16310.83,10517.74 ccw(c16301.77,10530.16) 16312.05,10518.73
  Bottom 6+gnd w5: U2.31@16113.19,10236.22 v1@16113.19,10298.06